# Altium PCB PCB2.PcbDoc
Units mil, origin at the board's own origin, x right, y up, seen from the top; angles counter-clockwise.
Board outline 3100 x 3000 mil, 2 copper layers (Top Layer, Bottom Layer); 53 components, 42 nets, 219 pads, 53 vias.
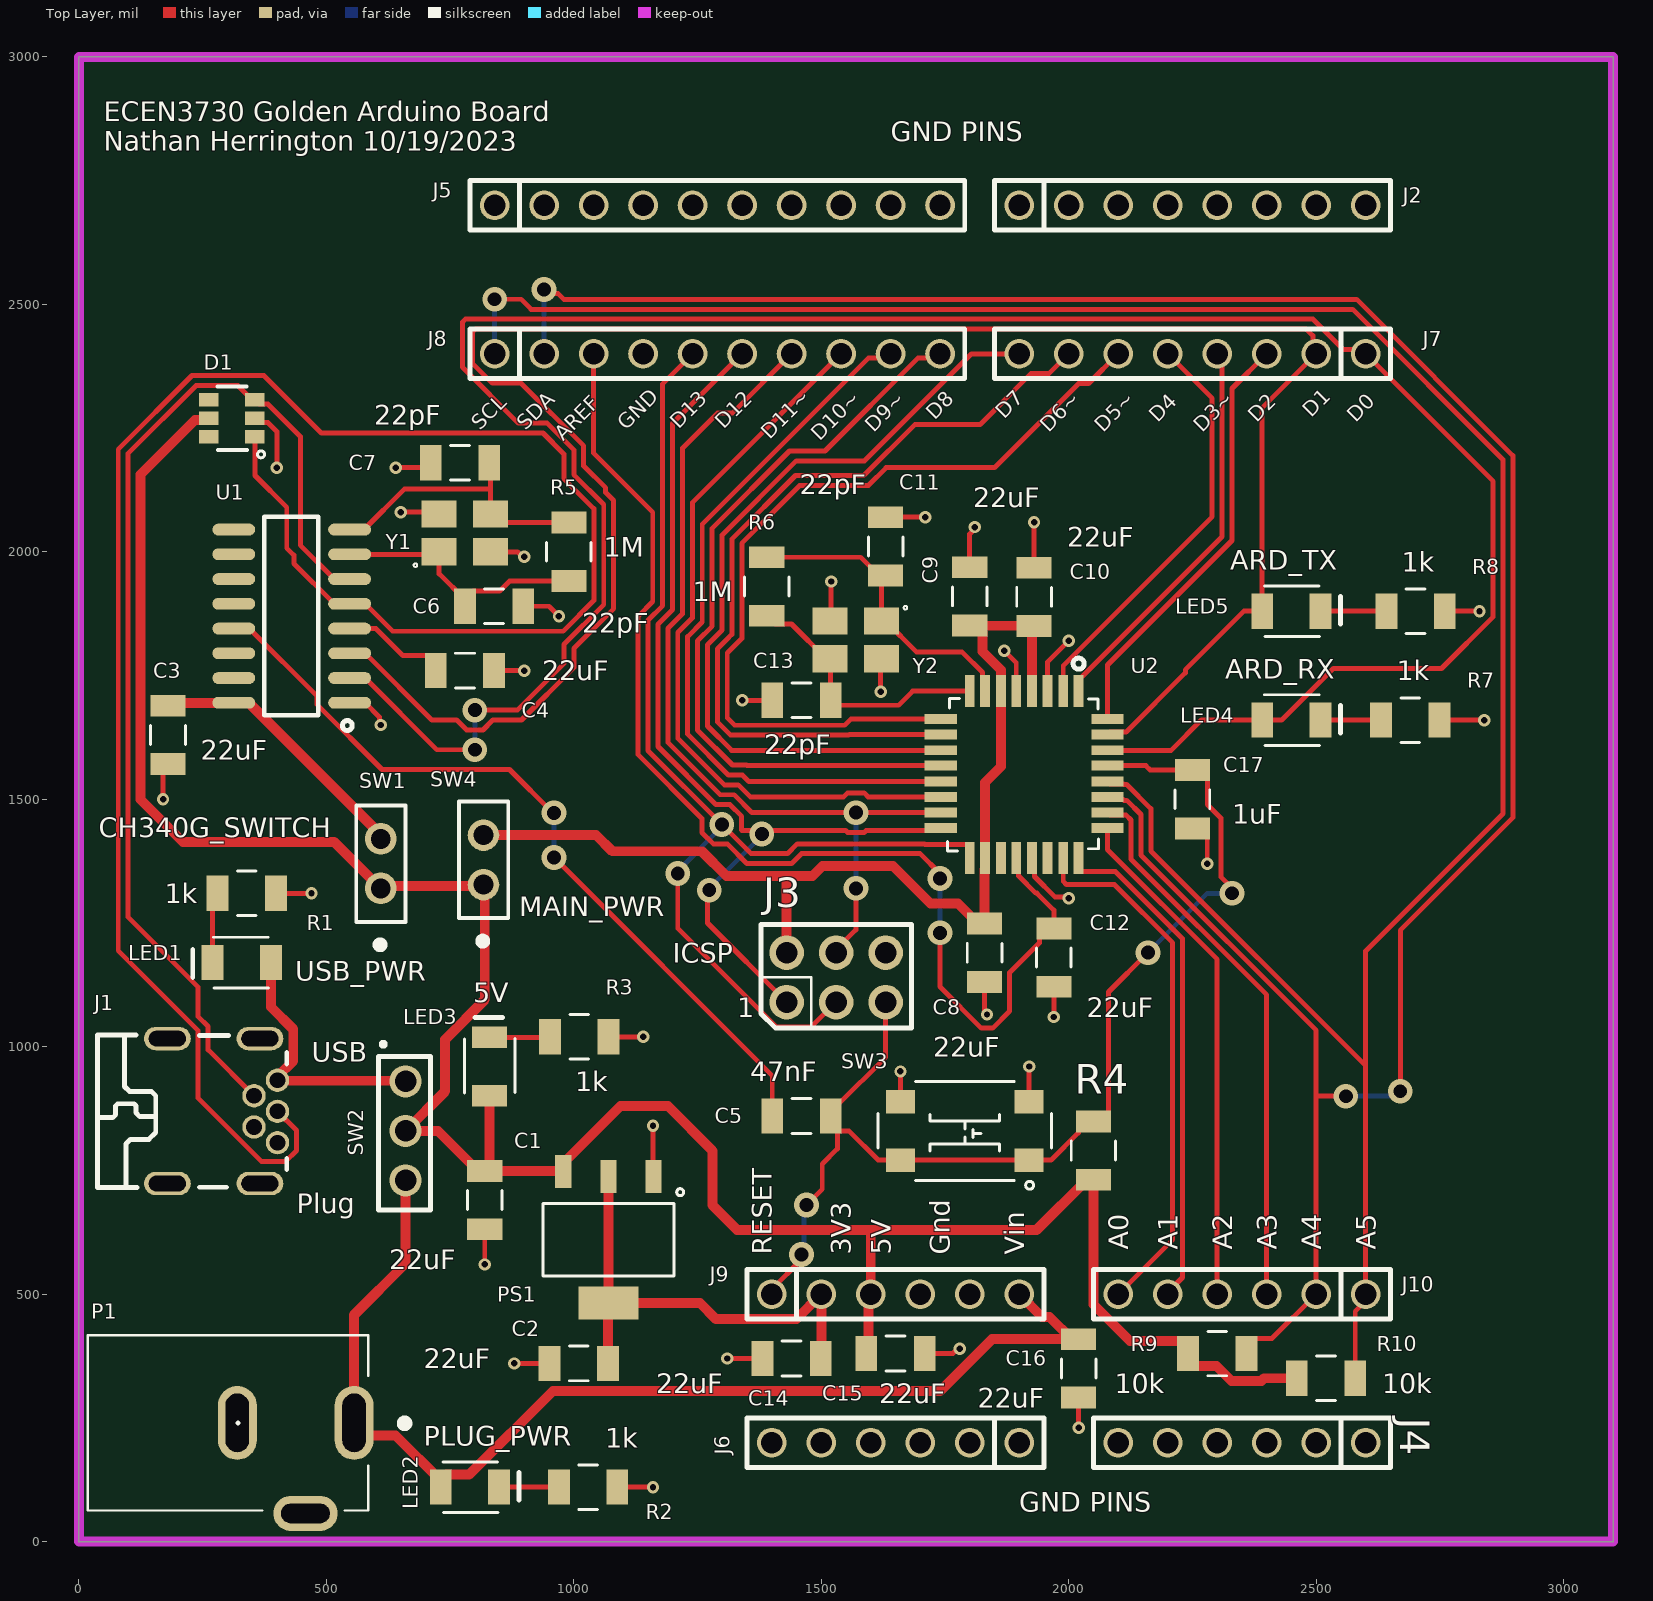
[diagram p0: Top Layer view]
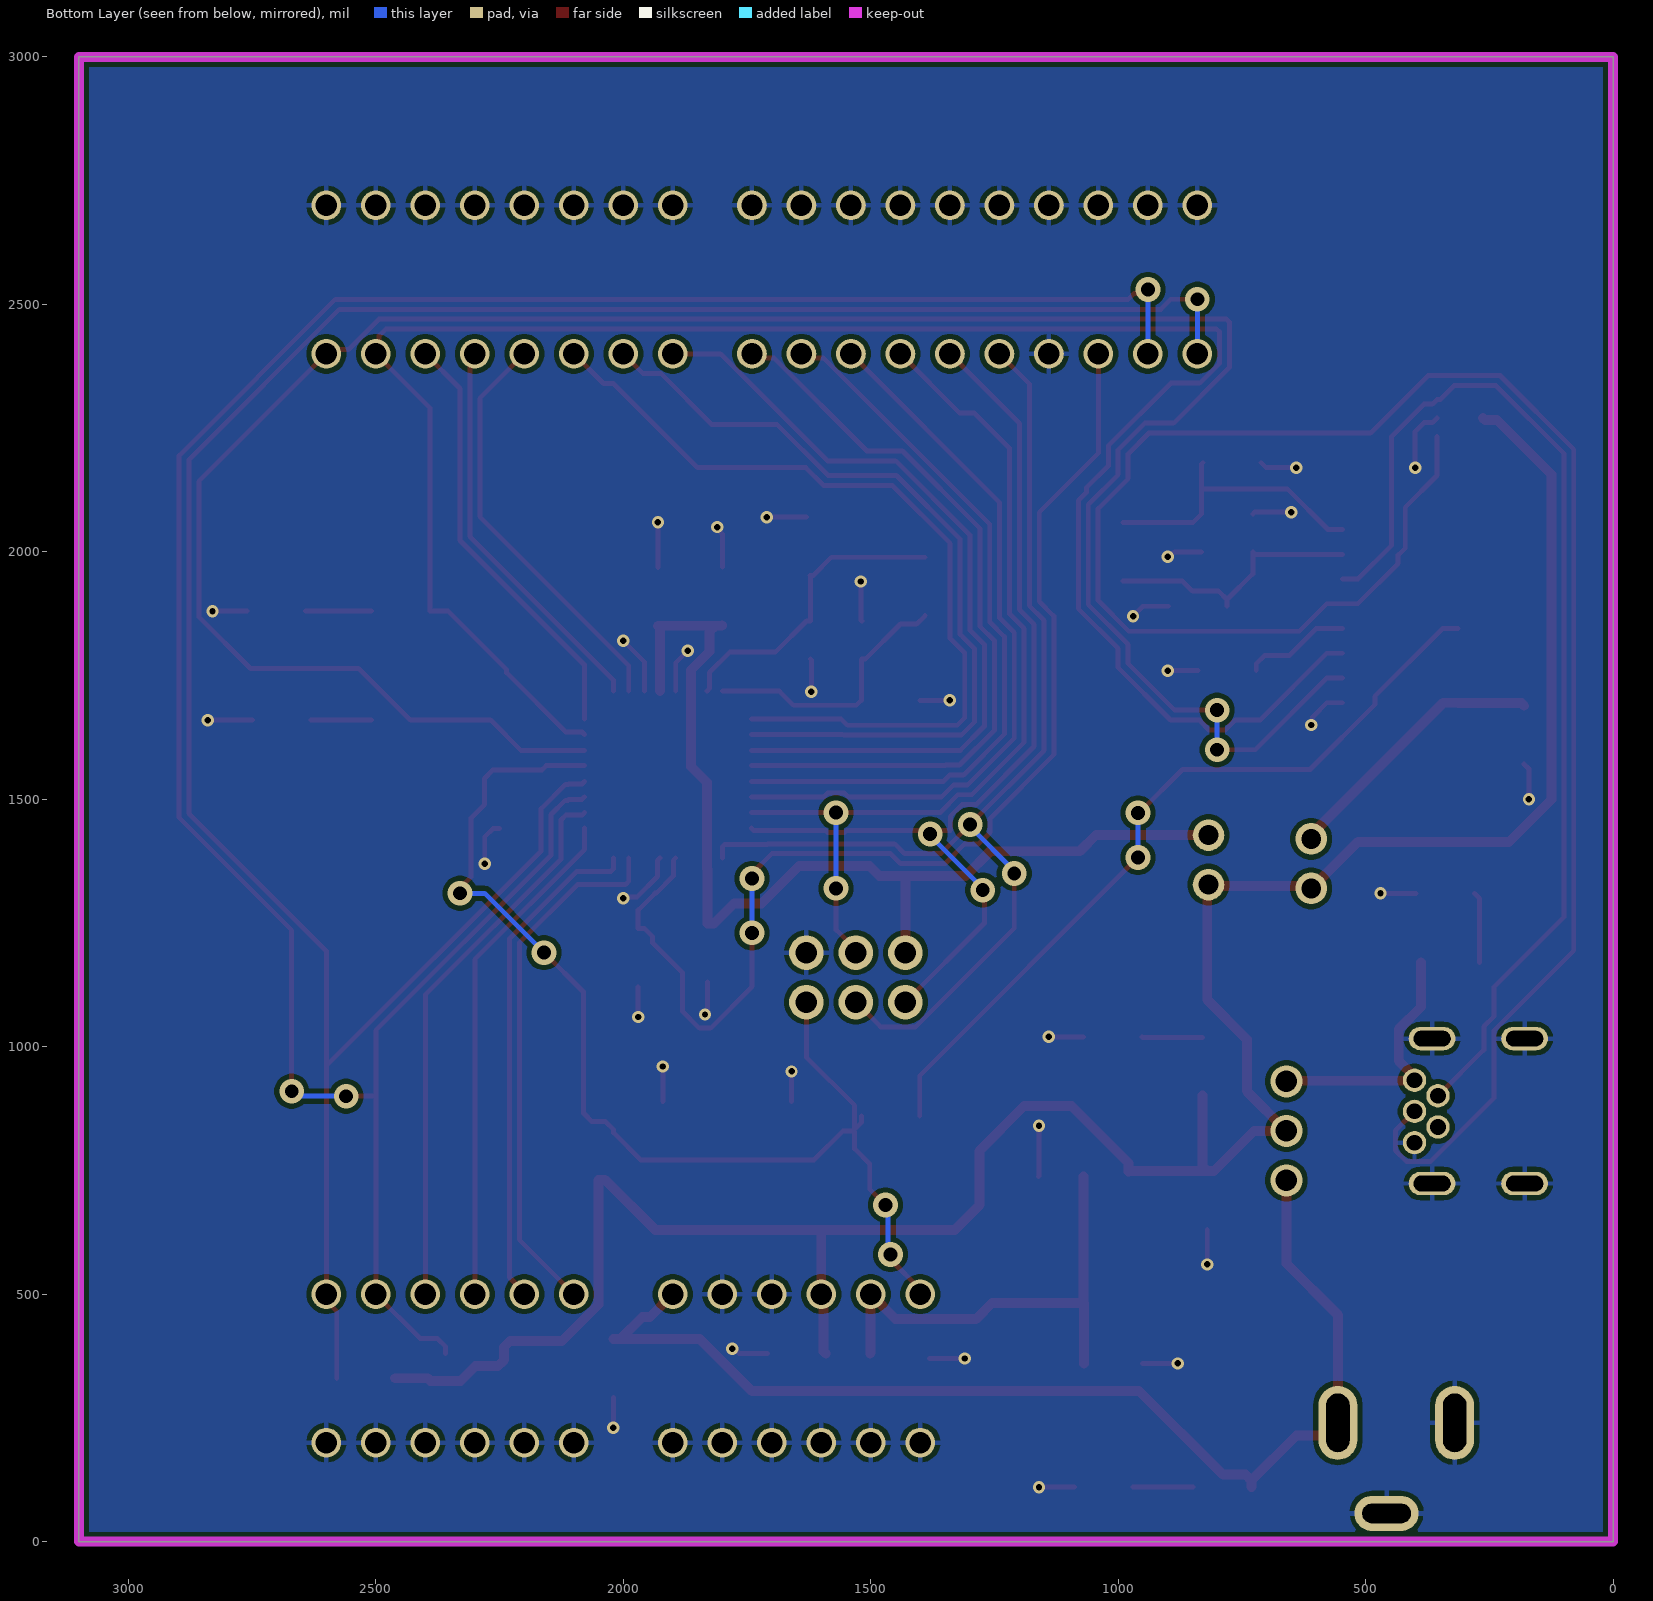
[diagram p1: Bottom Layer view, seen from below]
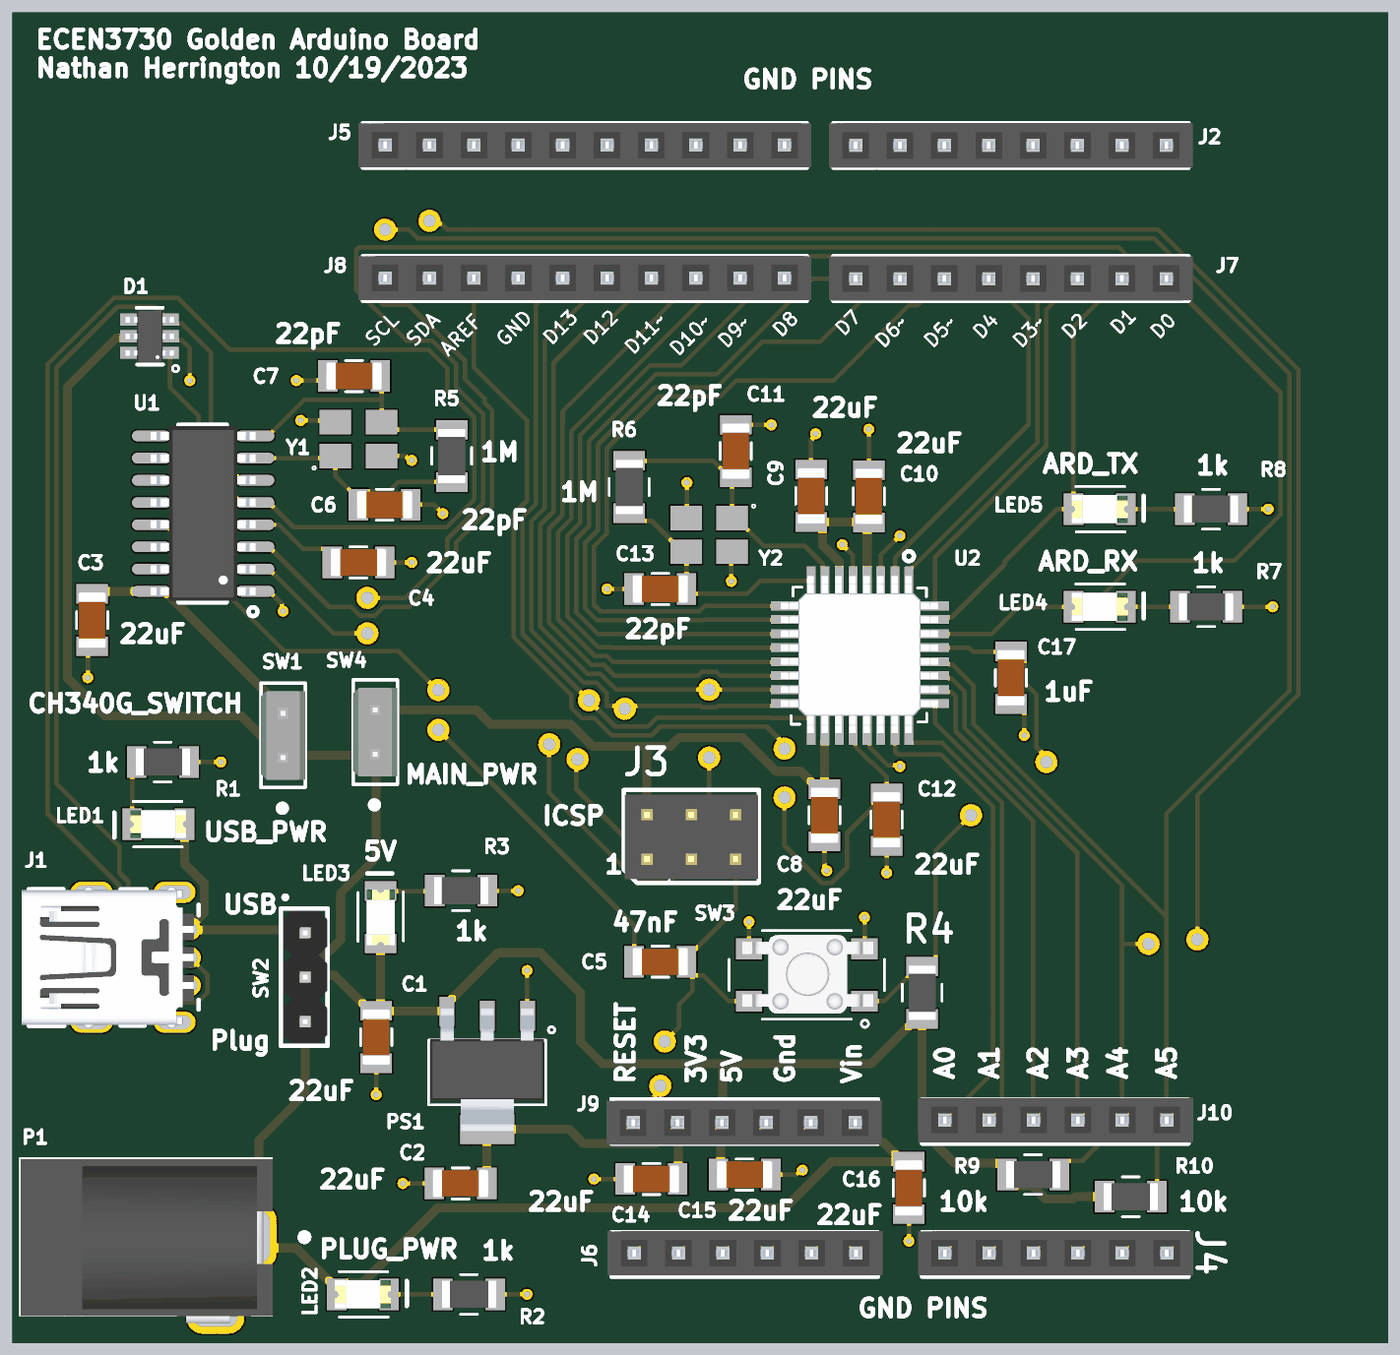
[diagram p2: 3D render of the assembled board from above, using the file's embedded part models]

## Layer stack, top to bottom
Top Solder: solder mask 0.4, Solder Resist, Dk 3.5
Top Layer: signal copper 1.4
Dielectric 1: dielectric 12.6, FR-4, Dk 4.8
Bottom Layer: signal copper 1.4
Bottom Solder: solder mask 0.4, Solder Resist, Dk 3.5

## Board outline
0,0 0,3000 3100,3000 3100,0

## Design rules (kind name [scope] priority, off if disabled: settings)
Clearance [All] p1: gap=10 ignorepadtopadclearanceinfootprint=FALSE except(0: Arc-Hole Track-Hole SMDPad-Hole THPad-Hole Via-Hole Fill-Hole Poly-Hole Region-Hole Text-Hole)
PolygonConnect [All] p1: connectstyle=Relief reliefconductorwidth=10 reliefentries=4 polygonreliefangle="90 Angle" airgapwidth=10
RoutingVias [All] p1: holewidth=28 width=50 viastyle="Through Hole" minholewidth=28 minwidth=50 maxholewidth=28 maxwidth=50
SolderMaskExpansion [All] p1: expansion=4 istentingtop=FALSE
Width "Schematic Width Constraint_5" [InNet('VIN')] p1: maxlimit=100 minlimit=20 preferedwidth=20 minimp=50.000000 maximp=50.000000 favimp=50.000000
Width "Schematic Width Constraint_4" [InNet('5V')] p2: maxlimit=100 minlimit=20 preferedwidth=20 minimp=50.000000 maximp=50.000000 favimp=50.000000
Width "Schematic Width Constraint_3" [InNet('3.3V')] p3: maxlimit=100 minlimit=20 preferedwidth=20 minimp=50.000000 maximp=50.000000 favimp=50.000000
Width "Schematic Width Constraint_2" [InNet('NetC8_1')] p4: maxlimit=100 minlimit=20 preferedwidth=20 minimp=50.000000 maximp=50.000000 favimp=50.000000
Width "Schematic Width Constraint_1" [InNet('NetC3_1')] p5: maxlimit=100 minlimit=20 preferedwidth=20 minimp=50.000000 maximp=50.000000 favimp=50.000000
Width "Schematic Width Constraint" [InNet('USBVCC')] p6: maxlimit=100 minlimit=20 preferedwidth=20 minimp=50.000000 maximp=50.000000 favimp=50.000000
Width [All] p7: maxlimit=10 minlimit=10 preferedwidth=10
30 further rules are at their usual default settings.

## Components (designator, comment, footprint, x,y, rotation, side; value= is the part's Value field where it differs from the comment)
C1 "22uF" 1206_Passive_Capacitor 820,690 r90 top
C2 "22uF" 1206_Passive_Capacitor 1010,360 r0 top
C3 "22uF" 1206_Passive_Capacitor 180,1630 r270 top
C4 "22uF" 1206_Passive_Capacitor 780,1760 r180 top
C5 "47nF" 1206_Passive_Capacitor 1460,860 r0 top
C6 "22pF" 1206_Passive_Capacitor 839,1890 r180 top
C7 "22pF" 1206_Passive_Capacitor 770,2180 r0 top
C8 "22uF" 1206_Passive_Capacitor 1830,1190 r270 top
C9 "22uF" 1206_Passive_Capacitor 1930,1909 r90 top
C10 "22uF" 1206_Passive_Capacitor 1800,1910 r90 top
C11 "22pF" 1206_Passive_Capacitor 1630,2011 r90 top
C12 "22uF" 1206_Passive_Capacitor 1970,1180 r90 top
C13 "22pF" 1206_Passive_Capacitor 1460,1700 r180 top
C14 "22uF" 1206_Passive_Capacitor 1440,370 r180 top
C15 "22uF" 1206_Passive_Capacitor 1650,380 r0 top
C16 "22uF" 1206_Passive_Capacitor 2020,350 r90 top
C17 "1uF" 1206_Passive_Capacitor 2250,1500 r270 top
D1 "SRV05-4-P-T7" TVS 310,2270 r180 top value="TVS DIODE 5.5V 6TSOP"
J1 "USB Mini" USB_MINI_B 290,870 r270 top value="USB mini B"
J2 "PPTC081LFBN-RC" 8_PIN_ARD-DIG_100MIL 1900,2700 r0 top value=Female
J3 "ICSP" ICSP 1430,1090 r90 top
J4 "PPTC061LFBN-RC" "6_PIN_100MIL -Female" 2600,200 r180 top value=Female
J5 "PPTC101LFBN-RC" 10_PIN_ARDUINO_100MIL 840,2700 r0 top value=Female
J6 "PPTC061LFBN-RC" "6_PIN_100MIL -Female" 1900,200 r180 top value=Female
J7 "PPTC081LFBN-RC" 8_PIN_ARD-DIG_100MIL 2600,2400 r180 top value=Female
J8 "PPTC101LFBN-RC" 10_PIN_ARDUINO_100MIL 840,2400 r0 top value=Female
J9 "PPTC061LFBN-RC" "6_PIN_100MIL -Female" 1400,500 r0 top value=Female
J10 "PPTC061LFBN-RC" "6_PIN_100MIL -Female" 2600,500 r180 top value=Female
LED1 "USB_PWR" LED_1206 329,1170 r180 top value=Red
LED2 "PLUG_PWR" LED_1206 790,110 r0 top value=Red
LED3 "5V" LED_1206 830,960 r90 top value=Red
LED4 "ARD_RX" LED_1206 2450,1660 r0 top value=Red
LED5 "ARD_TX" LED_1206 2450,1880 r0 top value=Red
P1 "Power Jack" Power_Jack 556.22,240 r180 top value="CONN PWR JACK 2X5.5MM SOLDER"
PS1 "AMS1117-3.3" LDO 1070,610 r180 top value="IC REG LINEAR 3.3V 800MA SOT223"
R1 "1k" 1206_Passive_Resitor 339,1310 r0 top value="1K Ohm"
R2 "1k" 1206_Passive_Resitor 1029,110 r0 top value="1K Ohm"
R3 "1k" 1206_Passive_Resitor 1011,1020 r0 top value="1K Ohm"
R4 "10k" 1206_Passive_Resitor 2050,790 r270 top value=10KOhm
R5 "1M" 1206_Passive_Resitor 990,2000 r90 top value="1M Ohm"
R6 "1M" 1206_Passive_Resitor 1390,1930 r270 top value="1M Ohm"
R7 "1k" 1206_Passive_Resitor 2690,1660 r0 top value="1K Ohm"
R8 "1k" 1206_Passive_Resitor 2701,1880 r0 top value="1K Ohm"
R9 "10k" 1206_Passive_Resitor 2300,380 r0 top value=10KOhm
R10 "10k" 1206_Passive_Resitor 2520,330 r0 top value=10KOhm
SW1 "CH340G_SWITCH" 2Pin-Header-Conn 610,1320 r90 top
SW2 "PREC003SAAN-RC" 3_PIN_100mil 660,930 r270 top value="CONN HEADER VERT 3POS 2.54MM"
SW3 "TL3305AF160QG" Switch_JLC 1790,830 r180 top
SW4 "MAIN_PWR" 2Pin-Header-Conn 817.5,1327.5 r90 top
U1 "CH340G" "USB to serial" 430,1870 r90 top value="USB to Serial"
U2 "ATMEGA328P-ANR" ATMega328P 1910,1550 r90 top value="IC MCU 8BIT 32KB FLASH 32TQFP"
Y1 "X322512MSB4SI" "Crystal resonator" 780,2040 r0 top value=12MHz
Y2 "X322516MLB4SI" "Crystal resonator" 1570,1820 r180 top value=16MHz

## Footprints (in the part's own frame and the unit in brackets; to place one, negate y for a bottom-side part, rotate by r counter-clockwise, add the part's x,y. Pads: shape width x height; smd on the part's side, far side on the other; paste and mask are expansions set on the pad)
2Pin-Header-Conn [mm]
  round 1.62 hole 1.02: 1(0,0) 2(2.54,0)
  silkscreen extent -3.03,-1.27 4.26,1.26, body extent -1.27,-1.27 3.81,1.27, height 8.13
3_PIN_100mil [mm]
  round 1.65 hole 1.1: 1(0,0) 2(2.54,0) 3(5.08,0)
  silkscreen extent -2,-1.4 6.6,1.27, body extent -1.14,-1.27 6.48,1.27, height 8.38
"6_PIN_100MIL -Female" [mil]
  round 60 hole 43.31: 1(0,0) 2(100,0) 3(200,0) 4(300,0) 5(400,0) 6(500,0)
  silkscreen extent -50,-50 550,50, body extent -61,-53 559,47, height 335
8_PIN_ARD-DIG_100MIL [mil]
  round 60 hole 43.31: 1(0,0) 2(100,0) 3(200,0) 4(300,0) 5(400,0) 6(500,0) 7(600,0) 8(700,0)
  silkscreen extent -50,-50 750,50, body extent -60,-50 760,50, height 335
10_PIN_ARDUINO_100MIL [mil]
  round 60 hole 43.31: 1(0,0) 2(100,0) 3(200,0) 4(300,0) 5(400,0) 6(500,0) 7(600,0) 8(700,0) 9(800,0) 10(900,0)
  silkscreen extent -50,-50 950,50, body extent -60,-49 960,51, height 335
1206_Passive_Capacitor [mil]
  rect 44x71 smd: 1(-59,0) 2(59,0)
  silkscreen extent -19,-35 19,35, body extent -63,-31 63,32, height 50
1206_Passive_Resitor [mil]
  rect 44x71 smd: 1(-59,0) 2(59,0)
  silkscreen extent -19,-45 19,45, body extent -61,-31 61,31, height 26
ATMega328P [mm]
  rect 1.65x0.508 smd mask+0.025: 1(4.28,-2.794) 2(4.28,-2.007) 3(4.28,-1.194) 4(4.28,-0.406) 5(4.28,0.406) 6(4.28,1.194) 7(4.28,2.007) 8(4.28,2.794) 17(-4.28,2.794) 18(-4.28,2.007) 19(-4.28,1.194) 20(-4.28,0.406) 21(-4.28,-0.406) 22(-4.28,-1.194) 23(-4.28,-2.007) 24(-4.28,-2.794)
  rect 0.508x1.65 smd mask+0.025: 9(2.843,4.28) 10(2.056,4.28) 11(1.243,4.28) 12(0.455,4.28) 13(-0.357,4.28) 14(-1.145,4.28) 15(-1.958,4.28) 16(-2.745,4.28) 25(-2.745,-4.28) 26(-1.958,-4.28) 27(-1.145,-4.28) 28(-0.357,-4.28) 29(0.455,-4.28) 30(1.243,-4.28) 31(2.056,-4.28) 32(2.843,-4.28)
  silkscreen extent -3.94,-3.81 5.97,3.94, body extent -4.45,-4.47 4.55,4.53, height 1.16
"Crystal resonator" [mm]
  rect 1.8x1.4 smd: 1(-1.32,-1.02) 2(1.32,-1.02) 3(1.32,0.92) 4(-1.32,0.92)
  silkscreen extent -2.63,-1.79 -2.45,-1.61, body extent -1.65,-1.2 1.65,1.2, height 0.8
ICSP [mil]
  round 70 hole 43.31: 1(0,0) 2(0,-100) 3(0,-200) 4(100,0) 5(100,-100) 6(100,-200)
  silkscreen extent -52,-252 157,52, body extent -44,-250 146,50, height 330
LDO [mm]
  rect 0.838x1.7 smd: 1(-2.311,-3.25) 2(0,-3.25) 3(2.311,-3.5)
  rect 3.099x1.7 smd: 4(0,3.25)
  silkscreen extent -3.86,-2.62 3.35,1.85, body extent -3.25,-3.65 3.25,3.35, height 1.85
LED_1206 [mil]
  rect 44x71 smd: 1(-59,0) 2(59,0)
  silkscreen extent -54,-51 99,51, body extent -63,-31 63,31, height 28
Power_Jack [mm]
  oval 2x3.8 hole 1.2 slot 3 at 90 deg: 1(0,0) 2(6,0)
  oval 3.3x1.8 hole 1 slot 2.5 at 0 deg: 3(2.5,4.65)
  silkscreen extent -2.79,-4.5 13.68,4.5, body extent -0.76,-4.45 13.64,4.95, height 11.49
Switch_JLC [mm]
  rect 1.5x1.2 smd: 1(-3.3,1.5) 2(3.3,1.5) 3(-3.3,-1.5) 4(3.3,-1.5)
  silkscreen extent -4.44,-2.54 4.45,3, body extent -3.8,-2.29 3.7,2.21, height 3.7
TVS [mm]
  rect 1x0.7 smd mask+0.025: 1(-1.162,0.95) 2(-1.162,0) 3(-1.162,-0.95) 4(1.2,-0.95) 5(1.2,0) 6(1.2,0.95)
  silkscreen extent -1.65,-1.63 0.76,2.03, body extent -1.37,-1.44 1.38,1.46, height 1.1
"USB to serial" [mil]
  oval 24x86.61 smd: 1(-175,-117) 2(-125,-117) 3(-75,-117) 4(-25,-117) 5(25,-117) 6(75,-117) 7(125,-117) 8(175,-117) 9(175,117) 10(125,117) 11(75,117) 12(25,117) 13(-25,117) 14(-75,117) 15(-125,117) 16(-175,117)
  silkscreen extent -231,-122 201,56, body extent -197,-118 197,118, height 71
USB_MINI_B [mm]
  round 1.2 hole 0.8: 1(-1.58,2.826) 2(-0.78,1.622) 3(0.02,2.826) 4(0.82,1.622) 5(1.62,2.826)
  oval 1.2x2.4 hole 0.8 slot 1.9 at 90 deg: 6(-3.72,1.924) 7(3.72,1.924) 8(-3.72,-2.826) 9(3.72,-2.826)
  silkscreen extent -3.89,-6.42 3.93,3.3, body extent -4.04,-6.83 4.06,3.02, height 3.98

## Part data
C1 C2 C3 C4 C8 C9 C10 C12 C14 C15 C16: library part C_22uF_1206, "22uF ±10% 25V X5R 1206 Multilayer Ceramic Capacitors MLCC - SMD/SMT RoHS", LCSC Part#=C12891, MFR Part #=CL31A226KAHNNNE, Datasheet=https://datasheet.lcsc.com/lcsc/1811031514_Samsung-Electro-Mechanics-CL31A226KAHNNNE_C12891.pdf, Type=basic
C5: library part C_47nF_1206, "47nF ±5% 50V C0G 1206 Multilayer Ceramic Capacitors MLCC - SMD/SMT RoHS", LCSC Part#=C21812, MFR Part #=GRM31M5C1H473JA01L, Datasheet=https://datasheet.lcsc.com/lcsc/1810201313_Murata-Electronics-GRM31M5C1H473JA01L_C21812.pdf, Type=Extended
C6 C7 C11 C13: library part C_22pF_1206, "22pF ±5% 1kV C0G 1206 Multilayer Ceramic Capacitors MLCC - SMD/SMT RoHS", LCSC Part#=C107174, MFR Part #=CC1206JKNPOCBN220, Datasheet=https://datasheet.lcsc.com/lcsc/1810241219_YAGEO-CC1206JKNPOCBN220_C107174.pdf, Type=Extended
C17: library part C_1uF_1206, "MULTILAYER CERAMIC CAPACITORS MLCC - SMD/SMT 1UF 50V 1206 ROHS", LCSC Part#=C1848, MFR Part #=CL31B105KBHNNNE, Digikey Link=https://www.digikey.com/product-detail/en/C1206C105M4RACTU/399-8150-1-ND/3471873/?itemSeq=304982366, Type=Basic
D1: library part D_TVS_Diode, "TVS SOT-23-6 ROHS", LCSC Part#=C85364, Datasheet=https://datasheet.lcsc.com/szlcsc/ProTek-Devices-SRV05-4-P-T7_C85364.pdf, MFR Part #=SRV05-4-P-T7, Type=Basic
J1: library part J_USB_B_Mini, "Through Hole USB Connectors RoHS", LCSC Part#=C46398, MFR Part #=920-462A2021D10102, Datasheet=https://datasheet.lcsc.com/szlcsc/2103081233_Jing-Extension-of-the-Electronic-Co-920-462A2021D10102_C46398.pdf, Type=Extended
J2 J7: library part JF_8_PIN_FEMA_ARD-Dig, "8 Position Header Connector 0.100\" (2.54mm) Through Hole Tin", LCSC Part#=C27438, Digikey Link=https://www.digikey.com/product-detail/en/PPTC081LFBN-RC/S7006-ND/810147/?itemSeq=304982354, MFR Part #=PPTC081LFBN-RC, Type=Extended
J3: library part J_ICSP, "Connector Header Through Hole 6 position 0.079\" (2.00mm)", LCSC Part#=C124384, MFR Part #=NRPN032PAEN-RC, Digikey Link=https://www.digikey.com/product-detail/en/NRPN032PAEN-RC/S5801-03-ND/804955/?itemSeq=304982355, Type=Extended
J4 J6 J9 J10: library part JF_6_PIN_FEMALE, "6 Position Header Connector 0.100\" (2.54mm) Through Hole Tin", LCSC Part#=C40877, Digikey Link=https://www.digikey.com/product-detail/en/PPTC061LFBN-RC/S7004-ND/810145/?itemSeq=304982353, MFR Part #=PPTC061LFBN-RC, Type=Extended
J5 J8: library part JF_10_PIN_FEMA_ARDUINO, "10 Position Header Connector 0.100\" (2.54mm) Through Hole Tin", LCSC Part#=C225507, Digikey Link=https://www.digikey.com/product-detail/en/PPTC101LFBN-RC/S7008-ND/810149/?itemSeq=304982352, MFR Part #=PPTC101LFBN-RC, Type=Extended
LED1 LED2 LED3 LED4 LED5: library part LED_RED_1206, "Red 621~631nm 1206 Light Emitting Diodes (LED) RoHS", LCSC Part#=C93133, MFR Part #=15-21/R6C-FQ1R1B/2T, Datasheet=https://datasheet.lcsc.com/szlcsc/1811151241_Everlight-Elec-15-21-R6C-FQ1R1B-2T_C93133.pdf, Type=Extended
P1: library part "P_Power Jack", "Power Barrel Connector Jack 2.10mm ID (0.083\"), 5.50mm OD (0.217\") Through Hole, Right Angle", LCSC Part#=C136744, MFR Part #=PJ-102A, Digikey Link=https://www.digikey.com/product-detail/en/PJ-102A/CP-102A-ND/275425/?itemSeq=304982367, Type=Extended
PS1: library part PS_AMS_LDO_3v3, "LOW DROPOUT REGULATORS(LDO) POSITIVE FIXED 1.3V @ 800MA 15V 3.3V 1A SOT-223 ROHS", LCSC Part#=C6186, MFR Part #=AMS1117-3.3, Type=Basic
R1 R2 R3 R7 R8: library part R_1K_1206, "CHIP RESISTOR - SURFACE MOUNT 1KOHMS ±1% 1/4W 1206 ROHS", LCSC Part#=C4410, MFR Part #=RNCP1206FTD1K00CT, Digikey Link=https://www.digikey.com/product-detail/en/RNCP1206FTD1K00/RNCP1206FTD1K00CT-ND/2240675/?itemSeq=304982373, Type=Basic
R4 R9 R10: library part R_10KOhm_1206, "10 kOhms ±5% 0.25W, 1/4W Chip Resistor 1206 (3216 Metric) Automotive AEC-Q200 Thick Film", LCSC Part#=C17902, MFR Part #=RMCF1206FT10K0, Digikey Link=https://www.digikey.com/en/products/detail/stackpole-electronics-inc/RMCF1206FT10K0/1759669, Type=Basic
R5 R6: library part R_1M_1206, "CHIP RESISTOR - SURFACE MOUNT 1MOHMS ±1% 1/4W 1206 ROHS", LCSC Part#=C17927, MFR Part #=RMCF1206JT1M00, Digikey Link=https://www.digikey.com/product-detail/en/RMCF1206JT1M00/RMCF1206JT1M00CT-ND/1942830/?itemSeq=304982358, Type=Basic
SW1 SW4: library part SW_2Pin_100mil_Switch, "2Pin Header", LCSC Part#=C124375, Type=Extended
SW2: library part SW_3Pin_100mil_Switch, "Connector Header Through Hole 3 position 0.100\" (2.54mm)", LCSC Part#=C49257, Digikey Link=https://www.digikey.com/product-detail/en/PREC003SAAN-RC/S1012EC-03-ND/2774851/?itemSeq=304982371, MFR Part #=PREC003SAAN-RC, Type=Extended
SW3: library part SW_Push_Button_JLC, "Tactile Switch SPST-NO Top Actuated Surface Mount", LCSC Part#=C2837550, MFR Part #=KH-4.5X4.5X4.3H-STM, Datasheet=https://datasheet.lcsc.com/lcsc/2106081532_Shenzhen-Kinghelm-Elec-KH-4.5X4.5X4.3H-STM_C2837550.pdf, Type=Extended
U1: library part U_USBtoSerial, "Transceiver USB 2.0 2Mbps SOP-16_150mil USB ICs RoHS", LCSC Part#=C14267, Datasheet=https://datasheet.lcsc.com/lcsc/2008191806_WCH-Jiangsu-Qin-Heng-CH340G_C14267.pdf, MFR Part #=CH340G, Type=Basic
U2: library part U_ATMega328P, "AVR AVR® ATmega Microcontroller IC 8-Bit 20MHz 32KB (16K x 16) FLASH 32-TQFP (7x7)", LCSC Part#=C14877, MFR Part #=ATMEGA328P-AU, Digikey Link=https://www.digikey.com/product-detail/en/ATMEGA328P-ANR/ATMEGA328P-ANRCT-ND/2774230/?itemSeq=304982365, Type=Basic
Y1: library part X_12MHz_Res, "SMD Crystal Resonators 12MHz ±10ppm SMD-3225_4P RoHS", LCSC Part#=C9002, Datasheet=https://datasheet.lcsc.com/szlcsc/Yangxing-Tech-X322512MSB4SI_C9002.pdf, MFR Part #=X322512MSB4SI, Type=Basic
Y2: library part X_16Mhz_Res, "±10ppm 16000000Hz -40℃~85℃ 贴片无源晶振 60Ω 9pF SMD3225-4P Crystals ROHS", LCSC Part#=C13738, MFR Part #=X322516MLB4SI, Type=Basic

## Via types
v1: diameter 25, hole 13, Top Layer to Bottom Layer, 33 vias
v2: diameter 50, hole 28, Top Layer to Bottom Layer, 20 vias

## Nets (pads, with @x,y where several pads share a name; then routed paths per layer and width w, separated by ;. In a path a pad name is that pad's centre, name@x,y a point inside that pad or via, vN(x,y) a via of type N, cw(c..) or ccw(c..) an arc to the next point about the centre after c; other vN are vias at no path point)
3.3V: C2.2 C14.1 J9.2 PS1.2 PS1.4 | length 962.8
  Top Layer w20: C2.2 1069,481.05 PS1.4 ; PS1.2 PS1.4 ; C14.1@1501,380 1500.5,380.5 1500.5,499.5 J9.2 1450,450 1286.88,450 1254.83,482.05 PS1.4
5V: C1.2 C15.1 D1.5 J9.3 LED3.1 PS1.3 R4.2 R9.1 R10.1 SW1.1 SW2.2 SW4.1 | length 5035.6
  Top Layer w20: D1.5 259.13,2266.38 234.79,2266.38 124.5,2156.09 124.5,1499.54 210.08,1413.96 516.04,1413.96 SW1.1 615,1325 815,1325 820,1330 820,1094.78 740.11,1014.9 740.11,910.11 SW2.2 725.5,830 806.5,749 C1.2 ; LED3.1 830,759 C1.2 ; C15.1 1595.5,384.5 1595.5,495.5 J9.3 1600,630 ; R10.1 2394.78,330 2389.28,324.5 2328.72,324.5 2298.72,354.5 2253,354.5 2241,366.5 R9.1 2241,393.5 2229,405.5 2123.79,405.5 2050,479.29 R4.2 2036.5,731 1935.5,630 1600,630 ; C1.2 977.8,749 PS1.3 979,764.76 1094.24,880 1190,880 1280.36,789.64 1280.36,679.64 1330,630 1600,630
16MHz1: C11.1 R6.1 U2.7 Y2.1 | length 627.8
  Top Layer w10: R6.1 1579.5,1989 1616.5,1952 1623.25,1952 1621.97,1950.72 Y2.1 1629.84,1860.16 1692.6,1797.4 1784.8,1797.4 1826,1756.2 1826,1723.5 U2.7
16MHz2: C13.1 R6.2 U2.8 Y2.3 | length 545.3
  Top Layer w10: R6.2 1407,1854 1439.94,1854 1510.16,1783.78 Y2.3 1519,1782.81 C13.1 1529,1690 1656.25,1690 1684.75,1718.5 U2.8
ATMEGARESET: C5.2 C17.1 J3.3 J9.1 R4.1 SW3.1 SW3.2 U2.29 | length 2370.8
  Top Layer w10: J9.1 1400,510 1460,570 v2(1460,580) ; v2(1470,680) 1502,712 1502,763 1532.5,793.5 C5.2@1532.5,827.5 ; C5.2 1519,846.5 C5.2@1532.5,833 ; J3.3 1630,978.89 1532.5,881.39 C5.2@1532.5,833 ; U2.29 2155.78,1567.93 2164.71,1559 C17.1 2263.5,1559 2280.5,1542 2280.5,1489.21 2307.5,1462.21 2307.5,1343.32 2330,1320.82 v2(2330,1310) ; v2(2160,1190) 2080.5,1110.5 2080.5,866 2063.5,849 R4.1 2036.5,849 2019.5,832 2019.5,826 1964.45,770.94 SW3.1 SW3.2 1615.05,770.94 1556.5,829.5 1536,829.5 C5.2@1532.5,833
  Bottom Layer w10: v2(1460,580) 1465,585 1465,675 v2(1470,680) ; v2(2160,1190) 2280,1310 v2(2330,1310)
CH340RXD: J7.2 LED5.1 U1.3 U2.31 | length 4163.4
  Top Layer w10: U1.3 578.31,1795 713.31,1660 763.43,1660 783.43,1640 816.57,1640 836.57,1660 894.28,1660 1000,1765.72 1000,1804.54 1080.5,1885.04 1080.5,2103.78 1064.39,2119.89 1064.39,2129.11 1020,2173.5 1020,2214.28 893.42,2340.86 835.5,2340.86 795,2381.36 795,2444.14 800.86,2450 2480,2450 2493.18,2436.82 2493.18,2406.82 J7.2 2391,2291 LED5.1 2354,1880 2235.6,1761.6 2235.6,1755.33 2116.2,1635.93 2083.5,1635.93 U2.31
CH340TXD: J7.1 LED4.1 U1.2 U2.30 | length 4873.6
  Top Layer w10: U1.2 578.31,1745 723.31,1600 v2(800,1600) ; v2(800,1680) 886,1680 980,1774 980,1812.82 1060.5,1893.32 1060.5,2095.5 1000,2156 1000,2206 946,2260 888.08,2260 775,2373.08 775,2464.14 780.86,2470 2493.64,2470 2555,2408.64 2591.36,2408.64 J7.1 2857.5,2142.5 2857.5,1868.61 2753.2,1764.3 2534.59,1764.3 2430.29,1660 LED4.1 2268.03,1660 2206.96,1598.93 U2.30
  Bottom Layer w10: v2(800,1600) 799.14,1600.86 799.14,1609.14 800,1610 v2(800,1680)
GND: C1.1 C2.1 C3.2 C4.1 C6.1 C7.1 C8.2 C9.2 C10.2 C11.2 C12.1 C13.2 C14.2 C15.2 C16.1 C17.2 D1.2 J1.5 J1.6 J1.7 J1.8 J1.9 J2.1 J2.2 J2.3 J2.4 J2.5 J2.6 J2.7 J2.8 J3.6 J4.1 J4.2 J4.3 J4.4 J4.5 J4.6 J5.1 J5.2 J5.3 J5.4 J5.5 J5.6 J5.7 J5.8 J5.9 J5.10 J6.1 J6.2 J6.3 J6.4 J6.5 J6.6 J8.4 J9.4 J9.5 P1.2 P1.3 PS1.1 R1.2 R2.2 R3.2 R7.2 R8.2 SW3.3 SW3.4 U1.1 U2.3 U2.5 U2.21 Y1.2 Y1.4 Y2.2 Y2.4 | length 2643.3
  Top Layer w10: v1(170,1500) 170,1561 C3.2 ; D1.2 364.39,2261.38 381.67,2261.38 400,2243.04 v1(400,2170) ; R1.2 v1(470,1310) ; U1.1 578.31,1695 607.13,1666.18 607.13,1652.87 v1(610,1650) ; v1(640,2170) 701,2170 C7.1 ; v1(650,2080) 724.25,2080 Y1.4 ; v1(820,560) C1.1 ; Y1.2 886.1,1999.84 895.94,1990 v1(900,1990) ; C4.1 v1(900,1760) ; v1(880,360) C2.1 ; C6.1 950,1890 v1(970,1870) ; R3.2 v1(1140,1020) ; R2.2 v1(1160,110) ; v1(1160,840) 1160,738.95 PS1.1 ; v1(1310,370) C14.2 ; v1(1340,1700) C13.2 ; Y2.2 1520,1862.13 v1(1520,1940) ; v1(1620,1717.5) 1620,1781.81 Y2.4 ; C11.2 v1(1710,2070) ; v1(1660,950) 1660,889.13 SW3.4 ; C15.2 1765.94,380 1775.94,390 v1(1780,390) ; C10.2 1800,2035.94 1810,2045.94 v1(1810,2050) ; C8.2 1830,1074.06 1834.95,1069.11 v1(1834.95,1065.05) ; v1(1870,1800) 1894,1776 U2.5 ; SW3.3 1920,889.13 v1(1920,960) ; U2.21 1931,1376.5 1931,1343.8 1972.5,1302.3 1997.7,1302.3 v1(2000,1300) ; C9.2 v1(1930,2060) ; U2.3 1957,1777 v1(2000,1820) ; v1(1970,1060) C12.1 ; v1(2020,230) C16.1 ; C17.2 2263,1441 2280,1424 v1(2280,1370) ; R7.2 v1(2840,1660) ; R8.2 v1(2830,1880)
NetC3_1: C3.1 SW1.2 U1.16 | length 551.2
  Top Layer w20: C3.1 185.23,1694.23 312.23,1694.23 U1.16 343.22,1695 610,1428.22 SW1.2
NetC4_2: C4.2 U1.4 | length 217.1
  Top Layer w10: U1.4 600.02,1845 654.52,1790.5 704,1790.5 721,1773.5 C4.2
NetC5_1: C5.1 U1.13 | length 1606.3
  Top Layer w10: U1.13 344.31,1845 481.35,1707.95 481.35,1691.16 612.51,1560 870,1560 957.5,1472.5 v2(960,1472.5) ; v2(960,1382.5) 1401,941.5 C5.1
  Bottom Layer w10: v2(960,1382.5) v2(960,1472.5)
NetC6_2: C6.2 R5.1 U1.7 Y1.1 | length 539.9
  Top Layer w10: U1.7 723.19,1995 Y1.1 728.03,1955.47 C6.2@780,1903.5 ; C6.2 C6.2@780,1903.5 ; R5.1 870.29,1941 849.79,1920.5 797,1920.5 C6.2@780,1903.5
NetC7_2: C7.2 R5.2 U1.8 Y1.3 | length 589
  Top Layer w10: U1.8 576.11,2045 657.74,2126.63 831.97,2126.63 ; C7.2 831.97,2177.03 831.97,2126.63 ; R5.2 849.19,2059 Y1.3 831.97,2126.63
NetC8_1: C8.1 C9.1 C10.1 J3.4 SW4.2 U2.4 U2.6 U2.18 | length 2157
  Top Layer w20: SW4.2 1045.11,1427.5 1077.61,1395 1258.64,1395 1308.64,1345 1430,1345 ; J3.4 1430,1345 ; C10.1 1800.5,1850.5 C10.1@1814,1850.5 ; U2.4 1926,1846 C9.1 1929.5,1850.5 C10.1@1814,1850.5 ; 1430,1345 1482.32,1345 1502.32,1365 1645,1365 1720.72,1289.28 1776.22,1289.28 1816.5,1249 C8.1 1830,1358.02 1831,1359.02 U2.18 1831,1534 1863,1566 U2.6 1863,1761.04 1825.5,1798.54 1825.5,1839 C10.1@1814,1850.5
NetC12_2: C12.2 J8.3 U2.20 | length 2419.3
  Top Layer w10: J8.3 1040,2199.3 1159.5,2079.8 1159.5,1899.5 1130,1870 1130,1590 1259.14,1460.86 1259.14,1432.57 1282.57,1409.14 1310.86,1409.14 1350,1370 1440,1370 1460,1390 1700,1390 1740,1350 v2(1740,1340) ; v2(1740,1230) 1740,1121.11 1823.55,1037.55 1846.34,1037.55 1880.5,1071.72 1880.5,1149.5 1940.64,1209.64 1940.64,1222 1957.64,1239 C12.2 1970,1276 1935.6,1310.4 1933.4,1310.4 1899,1344.8 1899,1376.5 U2.20
  Bottom Layer w10: v2(1740,1230) v2(1740,1340)
NetD1_1: D1.1 J1.3 U1.5 | length 4060.9
  Top Layer w10: D1.1 355.77,2154.23 420,2090 420,2007.49 434.39,1993.1 434.39,1976.3 515.69,1895 U1.5 578.31,1895 633.81,1839.5 978.39,1839.5 1040.5,1901.61 1040.5,2087.21 980,2147.71 980,2197.71 937.71,2240 490,2240 373.82,2356.18 228.57,2356.18 79.5,2207.11 79.5,1193.94 240.99,1032.45 240.99,895.98 369.37,767.6 417.25,767.6 439.88,790.23 439.88,830.59 J1.3
NetD1_3: D1.3 J1.2 U1.6 | length 2198.6
  Top Layer w10: J1.2 260.99,993.59 260.99,1040.74 240.99,1060.74 240.99,1120.3 99.5,1261.79 99.5,2198.82 236.86,2336.18 321.08,2336.18 349.86,2307.4 D1.3 364.39,2298.78 381.67,2298.78 447.34,2233.11 447.34,2013.35 515.69,1945 U1.6
NetJ3_1: J3.1 J8.6 U2.16 | length 1984.9
  Top Layer w10: v2(1273.64,1316.36) 1270,1312.72 1270,1250 J3.1 ; J8.6 1199.5,2259.5 1199.5,1882.93 1170,1853.43 1170,1606.57 1287.43,1489.14 1315.71,1489.14 1339.14,1465.71 1339.14,1437.79 1340,1436.93 1373.07,1436.93 v2(1380,1430) 1386.93,1436.93 1549.43,1436.93 1553.43,1432.93 1586.57,1432.93 1590.57,1436.93 1736.5,1436.93 U2.16
  Bottom Layer w10: v2(1273.64,1316.36) 1273.64,1320 1380,1426.36 v2(1380,1430)
NetJ3_2: J3.2 J8.5 U2.17 | length 2278.6
  Top Layer w10: v2(1210,1350) 1210,1239.29 1409.29,1040 1480,1040 J3.2 ; J8.5 1179.5,2339.5 1179.5,1891.22 1150,1861.72 1150,1598.28 v2(1299.14,1449.14) 1358.28,1390 1431.72,1390 1451.72,1410 1708.28,1410 1709.31,1408.98 1795,1408.98 1800,1403.98 U2.17
  Bottom Layer w10: v2(1210,1350) 1210,1355 1299.14,1444.14 v2(1299.14,1449.14)
NetJ3_5: J3.5 J8.7 U2.15 | length 1816.1
  Top Layer w10: J8.7 1320.22,2280.22 1290.22,2280.22 1219.5,2209.5 1219.5,1874.65 1190,1845.15 1190,1614.85 1295.71,1509.14 1323.99,1509.14 1360.21,1472.93 U2.15 ; J3.5 1530,1196.02 1570,1236.02 v2(1570,1320)
  Bottom Layer w10: v2(1570,1320) v2(1570,1472.93)
NetJ7_3: J7.3 U2.32 | length 871.2
  Top Layer w10: U2.32 2078.5,1771.2 2330,2022.7 2330,2330 J7.3
NetJ7_4: J7.4 U2.1 | length 805.8
  Top Layer w10: U2.1 2020,1740.98 2310,2030.98 2310,2376.47 2300,2386.47 J7.4
NetJ7_5: J7.5 U2.2 | length 843.5
  Top Layer w10: U2.2 1989,1770.11 2290,2071.11 2290,2310 J7.5
NetJ7_6: J7.6 U2.9 | length 1726.8
  Top Layer w10: U2.9 1559.64,1661.93 1547.21,1649.5 1325.06,1649.5 1310,1664.56 1310,1795.44 1339.5,1824.94 1339.5,2017.21 1456.36,2134.07 1595.18,2134.07 1631.22,2170.11 1850.11,2170.11 2020,2340 2040,2340 J7.6
NetJ7_7: J7.7 U2.10 | length 1680.2
  Top Layer w10: U2.10 1556.93,1630.93 1555.5,1629.5 1316.77,1629.5 1290,1656.27 1290,1803.73 1310,1823.73 1319.5,1833.23 1319.5,2025.5 1448.08,2154.07 1586,2154.07 1688.96,2257.04 1820.68,2257.04 1923.64,2360 1960,2360 J7.7
NetJ7_8: J7.8 U2.11 | length 1642
  Top Layer w10: U2.11 1319.06,1598.93 1270,1647.99 1270,1812.01 1299.5,1841.51 1299.5,2033.78 1449.54,2183.82 1587.46,2183.82 1803.64,2400 J7.8
NetJ8_1: J8.1 J10.1 R10.2 U2.28 | length 5071.5
  Top Layer w10: v2(840,2510.28) 893.56,2510.28 913.83,2490 2573.64,2490 2877.5,2186.14 2877.5,1470.91 2600,1193.41 2600,961.42 ; U2.28 2083.5,1530.93 2110.84,1530.93 2111.84,1529.93 2117.2,1529.93 2165.98,1481.14 2165.98,1395.44 2600,961.42 ; R10.2 2579,465.47 2600,486.47 J10.1 2600,961.42
  Bottom Layer w10: J8.1 v2(840,2510.28)
NetJ8_2: J8.2 J10.2 R9.2 U2.27 | length 5178.4
  Top Layer w10: v2(940,2530) 947.65,2522.35 967.65,2522.35 980,2510 2581.92,2510 2897.5,2194.42 2897.5,1462.62 2670,1235.12 v2(2670,910) ; U2.27 2083.5,1499.93 2109.84,1499.93 2111.84,1497.93 2117.2,1497.93 2145.98,1469.14 2145.98,1387.15 2500,1033.14 2500,900 ; R9.2 2359,393.5 2376,410.5 2410.5,410.5 J10.2 2500,900 ; v2(2560,900) 2500,900
  Bottom Layer w10: J8.2 v2(940,2530) ; v2(2560,900) 2664.14,900 2670,905.86 v2(2670,910)
NetJ8_8: J8.8 U2.14 | length 1500.6
  Top Layer w10: J8.8 1240,2100 1240,2070 1239.5,2069.5 1239.5,1866.36 1210,1836.86 1210,1623.14 1303.99,1529.14 1332.28,1529.14 1356.49,1504.93 1545.43,1504.93 1553.43,1512.93 1586.57,1512.93 1594.57,1504.93 U2.14
NetJ8_9: J8.9 U2.13 | length 1510.8
  Top Layer w10: J8.9 1631.36,2391.36 1595,2391.36 1259.5,2055.86 1259.5,1858.08 1230,1828.58 1230,1631.42 1312.28,1549.14 1340.56,1549.14 1353.78,1535.93 U2.13
NetJ8_10: J8.10 U2.12 | length 1547.8
  Top Layer w10: J8.10 1731.36,2391.36 1695,2391.36 1507.46,2203.82 1435.75,2203.82 1279.5,2047.58 1279.5,1849.79 1250,1820.29 1250,1639.71 1320.56,1569.14 1348.85,1569.14 1350.06,1567.93 U2.12
NetJ10_3: J10.3 U2.26 | length 1125.2
  Top Layer w10: U2.26 2083.5,1467.93 2116.2,1467.93 2125.98,1458.14 2125.98,1378.87 2400,1104.85 J10.3
NetJ10_4: J10.4 U2.25 | length 1033.7
  Top Layer w10: U2.25 2078.5,1398.06 2300,1176.57 J10.4
NetJ10_5: J10.5 U2.24 | length 1021.5
  Top Layer w10: U2.24 2020,1359.02 2025,1354.02 2094.27,1354.02 2230,1218.28 2230,533.64 2200,503.64 J10.5
NetJ10_6: J10.6 U2.23 | length 1075.4
  Top Layer w10: U2.23 1989,1334.02 1995.52,1327.5 2092.5,1327.5 2210,1210 2210,610 J10.6
NetLED1_2: LED1.2 R1.1 | length 144.1
  Top Layer w10: LED1.2 270,1300 R1.1
NetLED2_2: LED2.2 R2.1 | length 121
  Top Layer w10: LED2.2 R2.1
NetLED3_2: LED3.2 R3.1 | length 122.4
  Top Layer w10: LED3.2 951,1019 R3.1
NetLED4_2: LED4.2 R7.1 | length 122
  Top Layer w10: LED4.2 R7.1
NetLED5_2: LED5.2 R8.1 | length 133
  Top Layer w10: LED5.2 R8.1
USBVCC: J1.1 LED1.1 SW2.1 | length 529.2
  Top Layer w20: LED1.1 388,1080.41 433,1035.41 433,971.32 401.25,939.58 J1.1 402.36,931.1 658.9,931.1 SW2.1
VIN: C16.2 J9.6 LED2.1 P1.1 SW2.3 | length 2321
  Top Layer w20: SW2.3 660,562.09 556.22,458.31 P1.1 581.65,214.57 639.93,214.57 LED2.1@731,123.5 ; LED2.1 LED2.1@731,123.5 ; J9.6 1946.03,453.97 1961.53,453.97 C16.2@2006.5,409 ; C16.2 C16.2@2006.5,409 ; LED2.1@731,123.5 743,135.5 788.72,135.5 957.72,304.5 1740.46,304.5 1844.96,409 C16.2@2006.5,409
pads on no net: D1.4 D1.6 J1.4 U1.9 U1.10 U1.11 U1.12 U1.14 U1.15 U2.19 U2.22

## Polygon pours and split planes (outlines as drawn)
GND on Bottom Layer "GND_L02_P000" (solid, pour order 0): 0,0 0,3000 3100,3000 3100,0

## Keep-outs
Keep-Out Layer:
  the board outline again, w20

## Silkscreen, mask and mechanical layers (free items; w line width, h text height)
Top Overlay:
  text "GND PINS" at 1640,2830 h40
  text "ECEN3730 Golden Arduino Board / Nathan Herrington 10/19/2023" at 50,2810 h40
  text "1" at 1330,1060 h40
  text "USB" at 470,970 h40
  text "Plug" at 440,663.33 h40
  text "A0" at 2120,590 h40 r90
  text "A1" at 2220,590 h40 r90
  text "A2" at 2330,590 h40 r90
  text "A3" at 2420,590 h40 r90
  text "A4" at 2510,590 h40 r90
  text "A5" at 2620,590 h40 r90
  text "RESET" at 1400,580 h40 r90
  text "3V3" at 1560,580 h40 r90
  text "5V" at 1640,580 h40 r90
  text "Gnd" at 1760,580 h40 r90
  text "Vin" at 1910,580 h40 r90
  text "GND PINS" at 1900,60 h40

## Text inside footprints (layer, text, board x,y; h text height)
J7: Top Overlay "D7" at 1870,2267.07 h30 r45; Top Overlay "D6~" at 1960,2240 h30 r45; Top Overlay "D4" at 2180,2260 h30 r45; Top Overlay "D3~" at 2270,2240 h30 r45; Top Overlay "D2" at 2380,2260 h30 r45; Top Overlay "D1" at 2490,2270 h30 r45; Top Overlay "D0" at 2580,2260 h30 r45; Top Overlay "D5~" at 2070,2240 h30 r45
J8: Top Overlay "D8" at 1729,2264.41 h30 r45; Top Overlay "D9~" at 1606,2239.67 h30 r45; Top Overlay "D10~" at 1497,2222 h30 r45; Top Overlay "D11~" at 1396,2225.53 h30 r45; Top Overlay "D12" at 1303,2246.74 h30 r45; Top Overlay "D13" at 1212,2246.74 h30 r45; Top Overlay "GND" at 1106,2243.21 h30 r45; Top Overlay "AREF" at 979,2222 h30 r45; Top Overlay "SDA" at 903,2243.21 h30 r45; Top Overlay "SCL" at 811,2243.21 h30 r45